# Altium PCB Mach3D.PcbDoc
Units mm, origin at the board's own origin, x right, y up, seen from the top; angles counter-clockwise.
Board outline 123.44 x 73.79 mm, 2 copper layers (Top Layer, Bottom Layer); 28 components, 20 nets, 77 pads, 0 vias.
Unrouted connection lines stored in the file: 9.
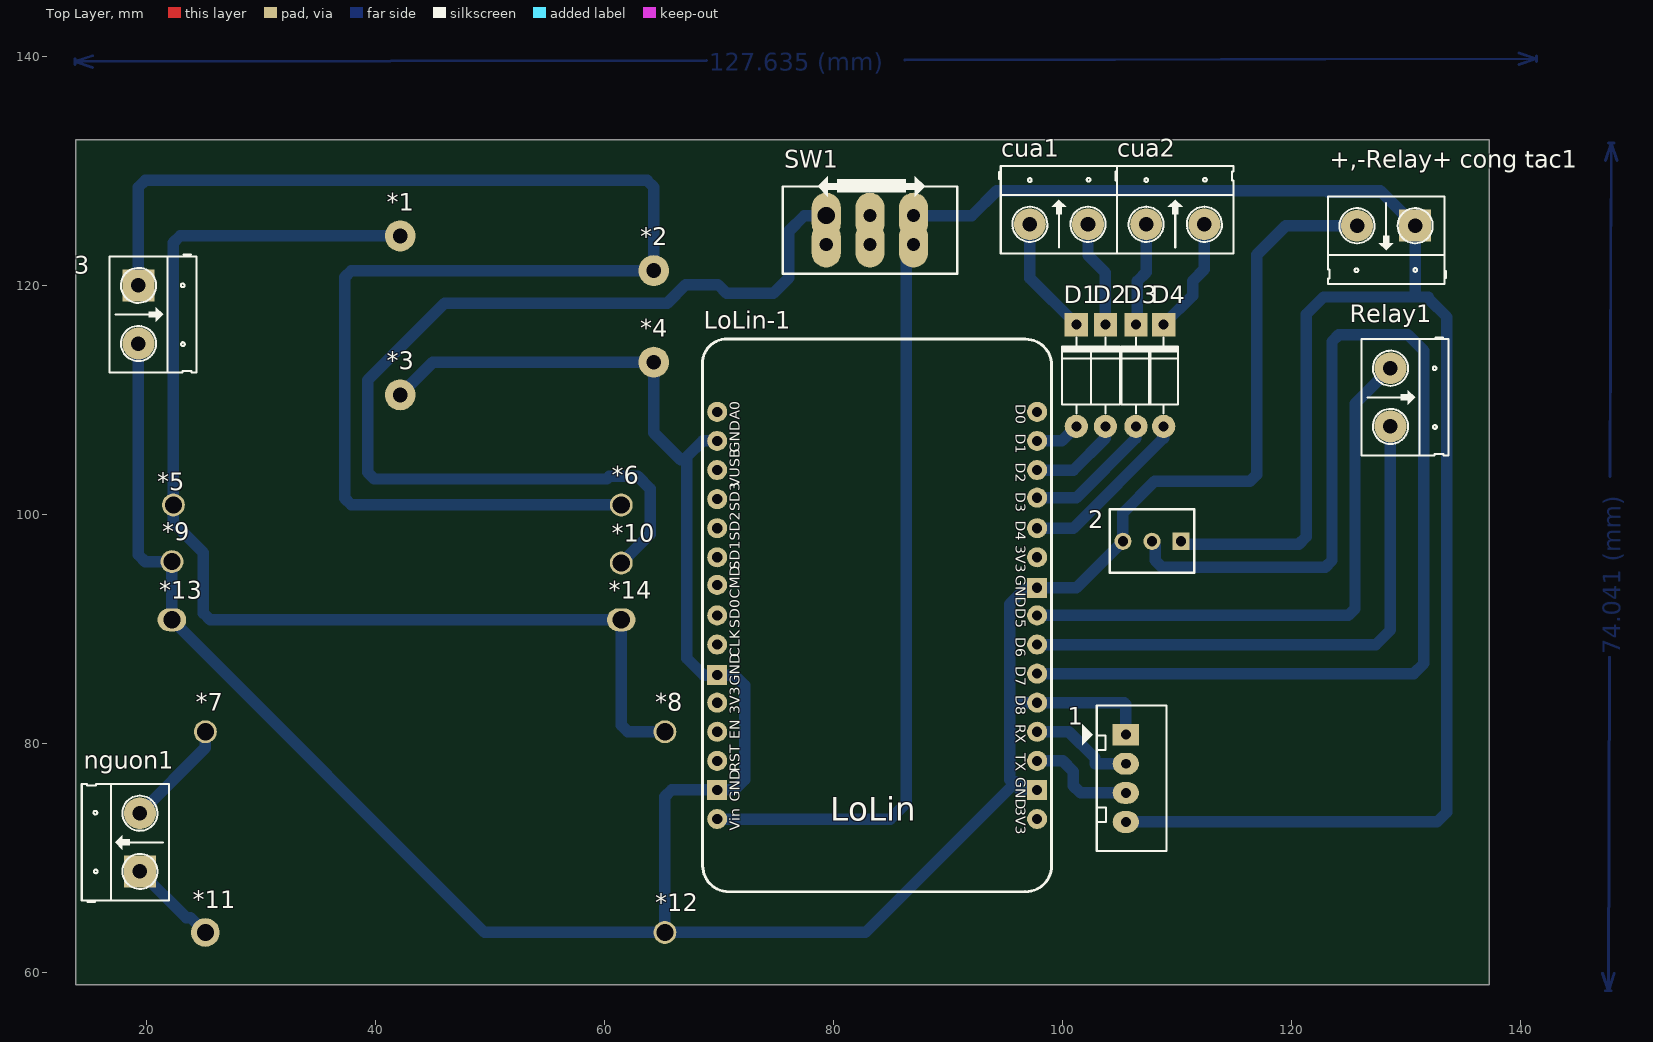
[diagram p0: Top Layer view]
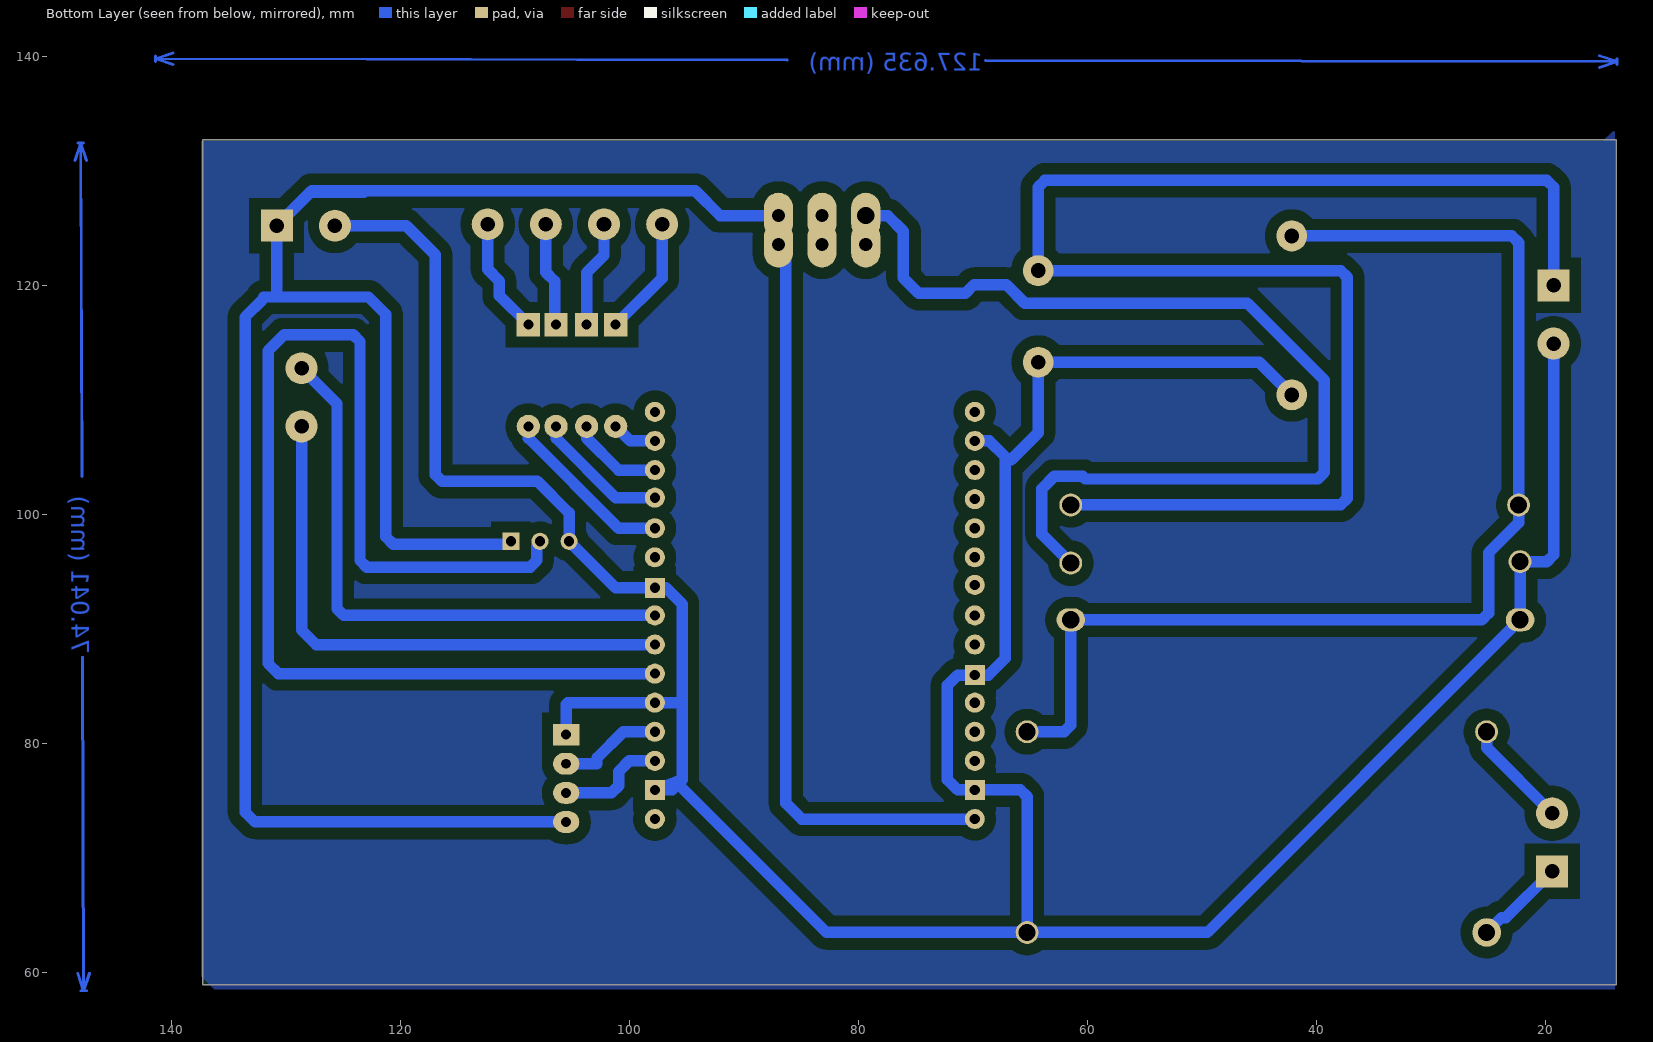
[diagram p1: Bottom Layer view, seen from below]
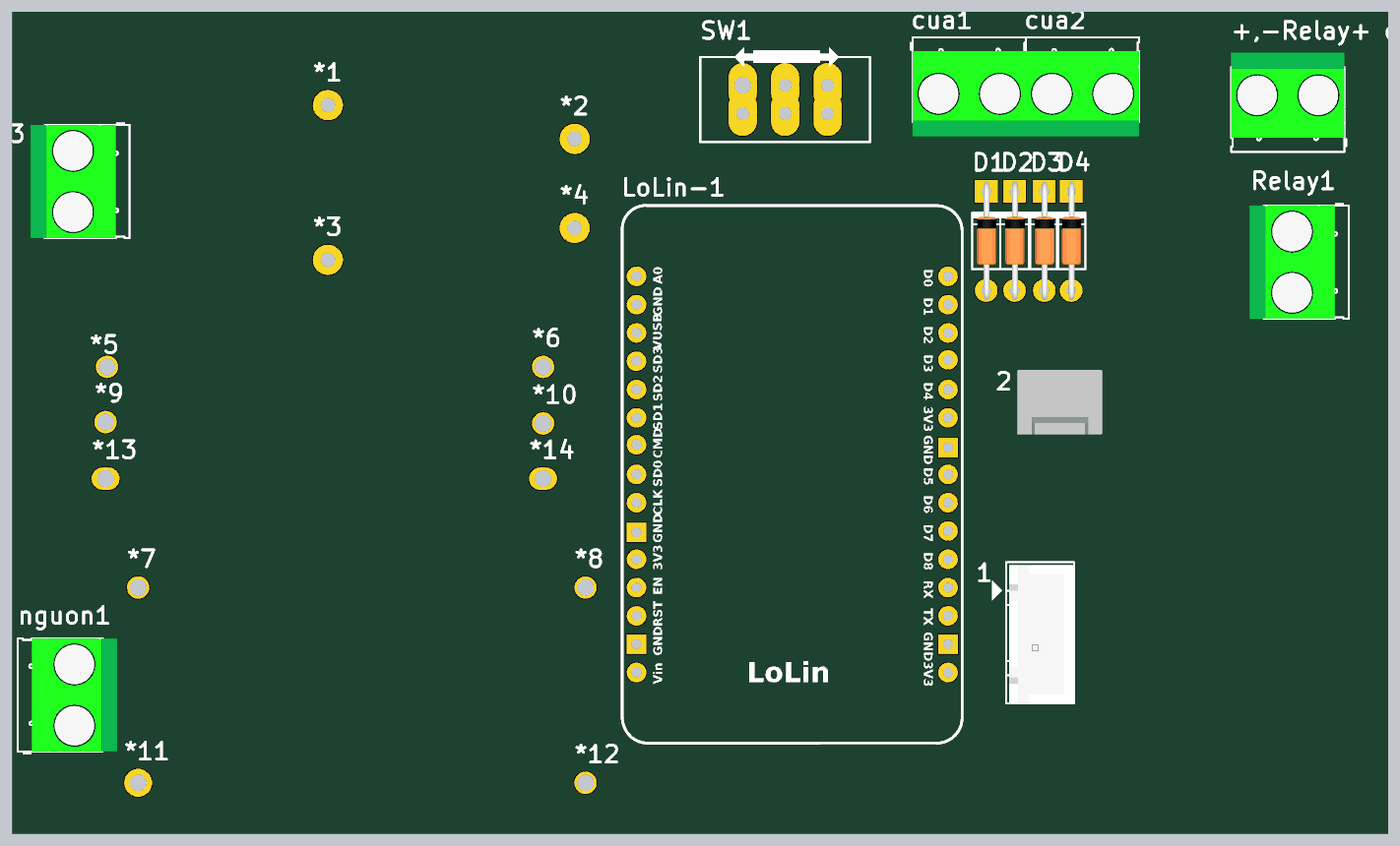
[diagram p2: 3D render of the assembled board from above, using the file's embedded part models]

## Layer stack, top to bottom
Top Solder: solder mask 0.0102, Solder Resist, Dk 3.5
Top Layer: signal copper 0.0356
Dielectric 1: dielectric 0.32, FR-4, Dk 4.8
Bottom Layer: signal copper 0.0356
Bottom Solder: solder mask 0.0102, Solder Resist, Dk 3.5

## Board outline
13.843,58.928 137.287,58.928 137.287,132.715 13.843,132.715

## Design rules (kind name [scope] priority, off if disabled: settings)
Clearance [All] p1: gap=1 ignorepadtopadclearanceinfootprint=FALSE
PolygonConnect [All] p1: connectstyle=Relief reliefconductorwidth=0.254 reliefentries=4 polygonreliefangle="90 Angle" airgapwidth=0.254
RoomDefinition MachNguyenLy [InComponentClass('MachNguyenLy')] p1: confinementstyle=ConfineIn formatcopy=TRUE lockcomponents=FALSE outline 0,0 50.8,0 50.8,25.4 0,25.4
RoutingLayers [All] p1: top layer_v5=FALSE bottom layer_v5=TRUE
RoutingVias [All] p1: holewidth=0.711 width=1.27 viastyle="Through Hole" minholewidth=0.711 minwidth=1.27 maxholewidth=0.711 maxwidth=1.27
SolderMaskExpansion [All] p1: expansion=0.102 istentingtop=FALSE
Width [All] p1: maxlimit=2 minlimit=1 preferedwidth=1
29 further rules are at their usual default settings.

## Components (designator, comment, footprint, x,y, rotation, side; value= is the part's Value field where it differs from the comment)
1 "Neo-6M" CON4 105.537,80.772 r270 top value="Connector 4"
2 "DHT11" HDR3 110.363,97.663 r180 top
3 "Chân sạc pin" header2_1#1 19.304,117.475 r270 top
*1 "sac+" "VIT OC"#1 42.799,124.079 r0 top
*2 "pin+" "VIT OC"#1 64.943,121.051 r0 top
*3 "sac-" "VIT OC"#1 42.799,110.199 r0 top
*4 "pin-" "VIT OC"#1 64.943,113.05 r0 top
*5 "DC+" "VIT OC"#2 22.987,100.584 r0 top
*6 "NC" "VIT OC"#2 62.103,100.584 r0 top
*7 "in+" "VIT OC"#2 25.781,80.772 r0 top
*8 "out+" "VIT OC"#2 65.913,80.772 r0 top
*9 "DC-" "VIT OC"#2 22.86,95.631 r0 top
*10 "COM" "VIT OC"#2 62.103,95.504 r0 top
*11 "in-" "VIT OC"#3 25.781,63.246 r0 top
*12 "out-" "VIT OC"#2 65.913,63.246 r0 top
*13 "IN" "VIT OC"#4 22.86,90.551 r0 top
*14 "ON" "VIT OC"#4 62.103,90.551 r0 top
"+,-Relay+ cong tac1" "Pin" header2_1#1 128.27,125.222 r180 top
cua1 "" header2_1#2 99.695,125.349 r0 top
cua2 "Công tắc cửa" header2_1#2 109.855,125.349 r0 top
D1 "1N4007" D1A 101.219,107.696 r270 top
D2 "1N4007" D1A 103.759,107.696 r270 top
D3 "1N4007" D1A 106.426,107.696 r270 top
D4 "1N4007" D1A 108.839,107.696 r270 top
LoLin-1 "NodeMCU V1.0 ESP-12E_1" "LoLin NodeMcu V3" 71.095,115.214 r0 top
nguon1 "Nguồn ắc quy" header2_1#1 19.431,71.374 r90 top
Relay1 "Cơ cấu chấp hành" header2_1#2 128.651,110.236 r270 top
SW1 "SWDPDT" SWDPDT_1.5x1 79.375,126.111 r0 top

## Footprints (in the part's own frame and the unit in brackets; to place one, negate y for a bottom-side part, rotate by r counter-clockwise, add the part's x,y. Pads: shape width x height; smd on the part's side, far side on the other; paste and mask are expansions set on the pad)
CON4 [mil]
  rect 75x90 hole 34: 1(0,0)
  oval 75x90 hole 34: 2(100,0) 3(200,0) 4(300,0)
  silkscreen extent -100,-150 400,140, body extent -90,-90 398,136, height 276
D1A [mil] "Diode 1A, W 100mil, L 350mil"
  round 80 hole 35: 1(0,0)
  rect 80x80 hole 35: 2(-350,0)
  silkscreen extent -305,-50 -45,50, body extent -386,-33 34,36, height 84
HDR3 [mm] "Connector; Header; 3 Position"
  rect 1.5x1.5 hole 0.9: 1(0,0)
  round 1.5 hole 0.9: 2(2.54,0) 3(5.08,0)
  silkscreen extent -1.14,-2.79 6.22,2.74, body extent -1.27,-2.92 6.35,2.88, height 11.72
header2_1#1 [mil] "header2, 1-trai, 200mil"
  rect 110x110 hole 50: 1(-100,0)
  round 110 hole 50: 2(100,0)
  silkscreen extent -206,-100 200,200, body extent -200,-150 200,150, height 402
header2_1#2 [mil] "header2, 1-trai, 200mil"
  round 110 hole 50: 1(-100,0) 2(100,0)
  silkscreen extent -206,-100 200,200, body extent -200,-150 200,150, height 402
"LoLin NodeMcu V3" [mil]
  round 69 hole 35: 3V3(-49,-1246) 3V3(1051,-1646) 3V3(1051,-746) A0(-49,-246) CLK(-49,-1046) CMD(-49,-841) D0(1051,-246) D1(1051,-346) D2(1051,-446) D3(1051,-541) D4(1051,-646) D5(1051,-946) D6(1051,-1046) D7(1051,-1146) D8(1051,-1246) EN(-49,-1346) GND(-49,-346) RST(-49,-1446) RX(1051,-1346) SD0(-49,-946) SD1(-49,-746) SD2(-49,-646) SD3(-49,-546) TX(1051,-1446) VIN(-49,-1646) VUSB(-49,-446)
  rect 69x69 hole 35: GND(-49,-1546) GND(-49,-1151) GND(1051,-1546) GND(1051,-851)
  silkscreen extent -100,-1896 1101,5
SWDPDT_1.5x1 [mm] "Switch DPDT, Pin to Pin 150mil, Row to Row 100mil"
  oval 2.54x4 hole 1.5: 1(0,0)
  oval 2.54x4 hole 1.143: 2(3.81,0) 3(7.62,0) 4(0,-2.54) 5(3.81,-2.54) 6(7.62,-2.54)
  silkscreen extent -3.81,-5.08 11.43,3.43
"VIT OC"#1 [mm]
  round 2.7 hole 1.3: 1(-0.635,0.254)
"VIT OC"#2 [mm]
  round 2 hole 1.5: 1(-0.635,0.254)
"VIT OC"#3 [mm]
  round 2.5 hole 1.5: 1(-0.635,0.254)
"VIT OC"#4 [mm]
  oval 2.5x2 hole 1.5: 1(-0.635,0.254)

## Part data
1: library part Con4, "Connector 4"
2: library part Header3, "Header IDC, 3 x 1 Pin Vertical 2.54mm Pitch (Non-Boxed, Male)", Manufacturer="W¨¹rth Elektronik eiSos GmbH", partNo=613002143121, ComponentLink1 Description=Manufacturer, ComponentLink1URL=http://www.we-online.com, ComponentLink2 Description=Datasheet, ComponentLink2URL=http://katalog.we-online.de/em/datasheet/6130xx143121.pdf, Created by="Karrer Zheng", Created Date="29 March 2013", NoPins=02
3 "+,-Relay+ cong tac1" cua1 cua2 nguon1 Relay1: library part header2, "ket noi 2 chan 200 mil"
*1 *2 *3 *4 *5 *6 *7 *8 *9 *10 *11 *12 *13 *14: library part "HOLE 1"
D1 D2 D3 D4: library part "Diode 1A", "Diode 1A"
LoLin-1: "LoLin NodeMCU V3"
SW1: "Switch SPDT", Creat by=VanDungEvn@Gmail.com

## Nets (pads, with @x,y where several pads share a name; then routed paths per layer and width w, separated by ;. In a path a pad name is that pad's centre, name@x,y a point inside that pad or via, vN(x,y) a via of type N, cw(c..) or ccw(c..) an arc to the next point about the centre after c; other vN are vias at no path point)
1: D1.1 LoLin-1.D1 | length 4
  Bottom Layer w1: LoLin-1.D1 99.949,106.426 D1.1
2: D2.1 LoLin-1.D2 | length 8.1
  Bottom Layer w1: LoLin-1.D2 100.967,103.886 103.735,106.654 D2.1@103.735,107.672
3: D3.1 LoLin-1.D3
4: D4.1 LoLin-1.D4
+esp: 1.4 2.1 "+,-Relay+ cong tac1.1" LoLin-1.VIN SW1.3 | length 166.4
  Bottom Layer w1: SW1.3 92.1,126.111 94.259,128.27 127.762,128.27 127.889,128.143 ; 1.4 132.715,73.152 133.579,74.016 133.579,117.246 132.08,118.745 ; 2.1 110.613,97.413 111.195,97.413 111.199,97.409 120.65,97.409 121.285,98.044 121.285,117.475 122.809,118.999 131.953,118.999 ; 123.23,128.143 127.889,128.143 ; 130.81,125.222 127.889,128.143
+pinvao: 3.1 *2.1 *6.1 | length 132.3
  Bottom Layer w1: 3.1 19.304,128.597 19.89,129.183 63.722,129.183 64.308,128.597 *2.1 37.9,121.305 37.314,120.719 37.314,101.424 37.9,100.838 *6.1
-esp: 1.1 2.3 3.2 "+,-Relay+ cong tac1.2" *3.1 *4.1 *9.1 *12.1 *13.1 LoLin-1.GND | length 227.1
  Bottom Layer w1: 3.2 19.304,96.471 19.89,95.885 *9.1 *13.1 49.53,63.5 *12.1 ; *3.1 45.015,113.304 *4.1 ; LoLin-1.GND@69.85,106.426 68.58,106.426 67.172,105.018 67.172,87.463 68.656,85.979 69.85,85.979 71.349,85.979 72.238,85.09 72.238,76.835 71.349,75.946 65.864,75.946 65.278,75.36 *12.1 ; 95.835,76.674 95.402,76.835 95.402,92.177 96.825,93.599 97.79,93.599 101.219,93.599 2.3 ; 95.854,76.41 95.847,76.391 96.291,75.946 97.79,75.946 95.938,76.636 ; 95.906,76.603 82.803,63.5 *12.1
button: *10.1 SW1.1 | length 90.1
  Bottom Layer w1: *10.1 63.983,98.273 63.983,102.26 62.905,103.338 60.432,103.338 60.197,103.103 39.9,103.103 39.314,103.688 39.314,111.727 46.042,118.455 65.489,118.455 67.113,120.079 69.912,120.079 70.669,119.322 74.755,119.322 76.098,120.665 76.098,124.739 77.47,126.111 SW1.1
dht11: 2.2 LoLin-1.D7 | length 107.1
  Bottom Layer w1: LoLin-1.D7 130.683,86.106 131.572,86.995 131.572,114.3 130.175,115.697 124.131,115.697 123.546,115.111 123.546,95.988 122.96,95.402 108.688,95.402 108.102,95.988 108.102,97.248 107.823,97.528 2.2
in+: *7.1 nguon1.2 | length 9.5
  Bottom Layer w1: nguon1.2 25.146,79.629 *7.1
in-: *11.1 nguon1.1 | length 7.9
  Bottom Layer w1: nguon1.1 23.47,64.795 23.851,64.795 *11.1
Netcua1_1: cua1.1 D1.2 | length 10.4
  Bottom Layer w1: cua1.1 97.155,120.65 D1.2
Netcua1_2: cua1.2 D2.2 | length 9.4
  Bottom Layer w1: cua1.2 102.235,122.647 103.759,121.123 D2.2
Netcua2_1: cua2.1 D3.2
Netcua2_2: cua2.2 D4.2
relayCua1: LoLin-1.D5 Relay1.1 | length 50.3
  Bottom Layer w1: LoLin-1.D5 124.966,91.186 125.552,91.772 125.552,109.677 Relay1.1
relayCua2: LoLin-1.D6 Relay1.2 | length 49.2
  Bottom Layer w1: LoLin-1.D6 127.381,88.646 128.651,89.916 Relay1.2
relayin+: *1.1 *5.1 *8.1 *14.1 | length 103.5
  Bottom Layer w1: *1.1 22.938,124.333 22.352,123.747 22.352,99.294 24.975,96.671 24.975,91.391 25.561,90.805 *14.1 61.468,81.612 62.054,81.026 *8.1
rx: 1.3 LoLin-1.TX | length 9.6
  Bottom Layer w1: LoLin-1.TX 100.025,78.486 100.952,77.559 100.952,76.319 101.58,75.692 1.3
tx: 1.2 LoLin-1.RX | length 9.2
  Bottom Layer w1: LoLin-1.RX 100.559,81.026 102.845,78.74 102.845,78.232 1.2
pads on no net: LoLin-1.3V3 LoLin-1.A0 LoLin-1.CLK LoLin-1.CMD LoLin-1.D0 LoLin-1.D8 LoLin-1.EN LoLin-1.RST LoLin-1.SD0 LoLin-1.SD1 LoLin-1.SD2 LoLin-1.SD3 LoLin-1.VUSB SW1.2 SW1.4 SW1.5 SW1.6
copper on no net: | length 369.8
  Bottom Layer w0.254: 13.756,139.809 13.757,139.301 ; 15.28,140.066 13.757,139.555 ; 15.282,139.05 13.757,139.555 ; 68.916,139.665 13.757,139.555 ; 86.233,139.699 141.392,139.809 ; 105.41,83.566 105.537,83.439 ; 106.426,106.68 106.426,107.696 ; 108.839,106.68 108.839,107.696 ; 139.867,140.314 141.392,139.809 ; 139.869,139.298 141.392,139.809 ; 141.391,140.063 141.392,139.555 ; 147.181,59.934 147.684,58.408 ; 147.424,130.927 147.938,132.449 ; 147.43,58.409 147.938,58.407 ; 147.684,132.45 148.192,132.448 ; 147.784,87.531 147.684,58.408 ; 147.838,103.325 147.938,132.449 ; 148.197,59.93 147.684,58.408 ; 148.44,130.923 147.938,132.449
  Bottom Layer w1: 64.308,113.304 64.308,107.142 66.675,104.775 ; 69.85,73.406 84.963,73.406 86.36,74.803 86.36,124.968 ; 95.631,83.566 97.79,83.566 105.41,83.566 ; 97.79,98.806 100.965,98.806 108.839,106.68 ; 97.79,101.473 101.219,101.473 106.426,106.68 ; 105.283,97.663 105.283,100.139 108.045,102.902 116.381,102.902 116.967,103.488 116.967,122.682 119.507,125.222 125.73,125.222 ; 105.537,80.772 105.537,83.439 ; 106.553,116.713 106.553,120.396 107.315,121.158 107.315,125.349 ; 108.839,116.586 111.379,119.126 111.379,120.396 112.395,121.412 112.395,125.349 ; 130.81,119.126 130.81,125.222

## Polygon pours and split planes (outlines as drawn)
no net on Mechanical 1 "NONET_L-01_P-001" (solid): 134.804,94.017 134.804,62.901 99.498,62.901 99.568,62.97 99.568,94.002
no net on Mechanical 1 "NONET_L-01_P-001" (solid): 68.199,120.268 99.059,120.268 99.06,120.269 99.06,63.119 98.806,62.865 68.617,62.865 68.554,62.929
no net on Mechanical 1 "NONET_L-01_P-001" (solid): 18.352,108.04 68.427,108.04 68.453,108.013 68.453,82.995 18.288,82.995
no net on Mechanical 1 "NONET_L-01_P-001" (solid): 39.201,126.238 67.225,126.238 67.268,126.196 67.268,108.966 39.201,108.966
no net on Bottom Layer "NONET_L02_P000" (solid, pour order 0): 13.97,133.604 14.986,132.588 137.414,132.588 137.414,59.69 136.271,58.547 13.97,58.547

## Other copper
Bottom Layer:
  text "127.635 (mm)" at 69.172,138.751 h1.52 r0.11
  text "74.041 (mm)" at 148.699,87.782 h1.52 r89.8

## Text inside footprints (layer, text, board x,y; h text height)
LoLin-1: Top Overlay "LoLin" at 79.731,72.542 h3.56; Top Overlay "CLK" at 72.136,87.528 h1.52 r90; Top Overlay "SD0" at 72.136,90.079 h1.52 r90; Top Overlay "SD1" at 72.136,95.181 h1.52 r90; Top Overlay "SD2" at 72.136,97.732 h1.52 r90; Top Overlay "SD3" at 72.136,100.283 h1.52 r90; Top Overlay "VUSB" at 72.111,102.387 h1.52 r90; Top Overlay "GND" at 72.136,105.385 h1.52 r90; Top Overlay "A0" at 72.136,108.28 h1.52 r90; Top Overlay "D5" at 95.631,91.821 h1.52 r270; Top Overlay "GND" at 95.631,94.717 h1.52 r270; Top Overlay "3V3" at 95.631,97.307 h1.52 r270; Top Overlay "D4" at 95.631,99.466 h1.52 r270; Top Overlay "D3" at 95.631,101.966 h1.52 r270; Top Overlay "D2" at 95.631,104.506 h1.52 r270; Top Overlay "D1" at 95.631,107.052 h1.52 r270; Top Overlay "D0" at 95.631,109.626 h1.52 r270; Top Overlay "CMD" at 72.136,92.63 h1.52 r90; Top Overlay "D6" at 95.631,89.303 h1.52 r270; Top Overlay "3V3" at 95.631,74.422 h1.52 r270; Top Overlay "GND" at 95.631,77.058 h1.52 r270; Top Overlay "TX" at 95.631,79.172 h1.52 r270; Top Overlay "RX" at 95.631,81.685 h1.52 r270; Top Overlay "D8" at 95.631,84.198 h1.52 r270; Top Overlay "D7" at 95.631,86.735 h1.52 r270; Top Overlay "Vin" at 72.136,72.365 h1.52 r90; Top Overlay "GND" at 72.136,74.905 h1.52 r90; Top Overlay "RST" at 72.136,77.521 h1.52 r90; Top Overlay "EN" at 72.136,80.366 h1.52 r90; Top Overlay "3V3" at 72.136,82.575 h1.52 r90; Top Overlay "GND" at 72.136,85.039 h1.52 r90